# EAGLE board interstage_A1v2 (EAGLE 9.2.2)
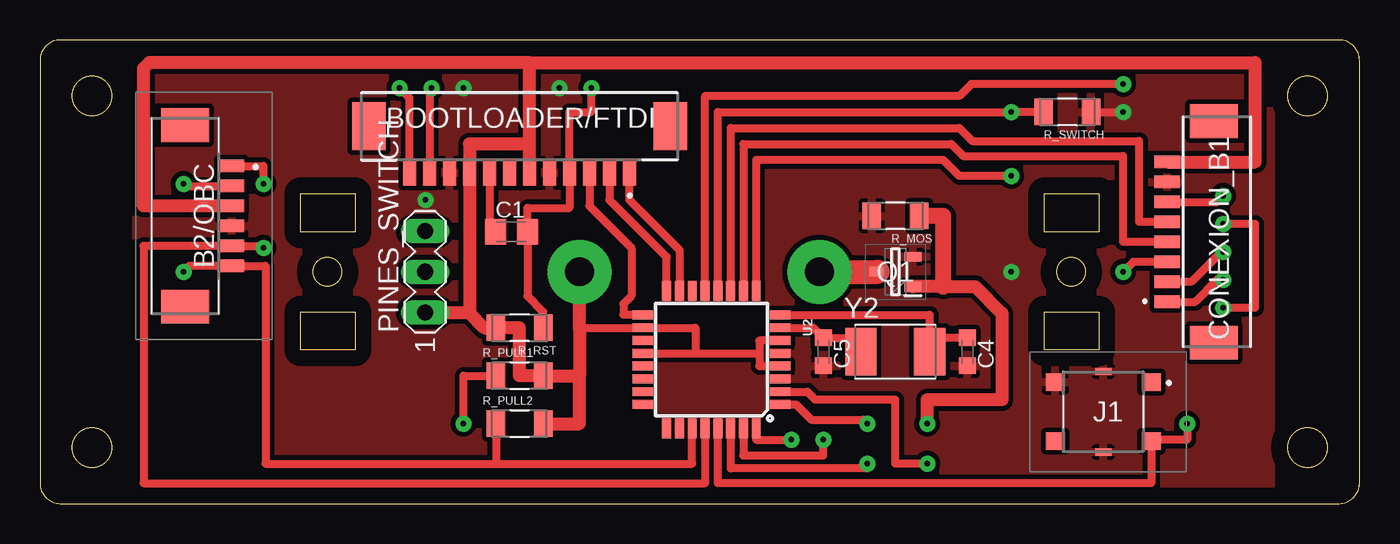
[diagram p0: board, top side]
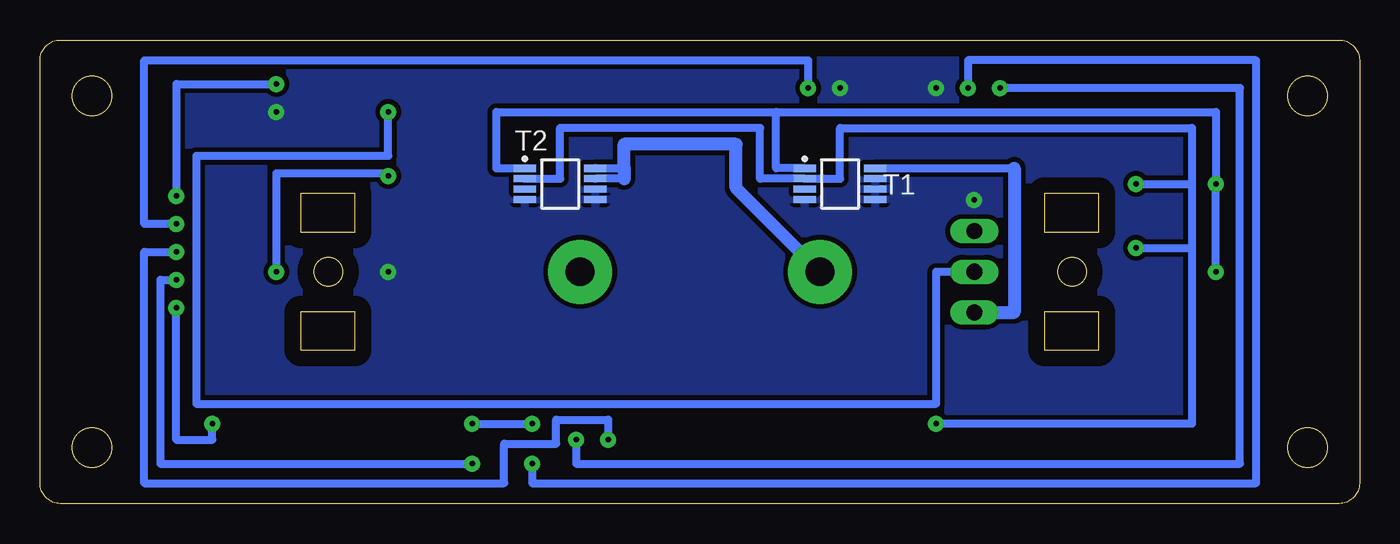
[diagram p1: board, bottom side, seen from below]

Size 82.5 x 29 mm. Coordinates in mm from the lower left corner, seen from the top.
Outline: 16.3,17 16.3,19.4 19.7,19.4 19.7,17 16.3,17
Outline: 62.8,9.6 62.8,12 66.2,12 66.2,9.6 62.8,9.6
Outline: 16.3,9.6 16.3,12 19.7,12 19.7,9.6 16.3,9.6
Outline: 62.8,17 62.8,19.4 66.2,19.4 66.2,17 62.8,17
Outline: 0,1.27 arc90 1.27,0 81.23,0 arc90 82.5,1.27 82.5,27.73 arc90 81.23,29 1.27,29 arc90 0,27.73 0,1.27
Outline: circle at 3.25,25.5 radius 1.25
Outline: circle at 79.25,3.5 radius 1.25
Outline: circle at 79.25,25.5 radius 1.25
Outline: circle at 3.25,3.5 radius 1.25
Outline: circle at 17.98,14.5 radius 0.9
Outline: circle at 64.48,14.5 radius 0.9
Copper layers (1*16): Top 0.035mm / dielectric 1.5mm / Bottom 0.035mm
Design rules "default *": minimum track width 6mil, minimum drill 0.35mm, track to track 0.3mm, track to pad 6mil, pad to pad 6mil, via to via 6mil, smd to smd 6mil, copper to edge 40mil, drill to drill 6mil, minimum pad ring 10mil, minimum via ring 8mil, stop-mask expansion 4mil, vias tented up to drill 0mil, thermal gap 10mil

## Footprints (pad centres in the part's own frame; a part is rotated, then mirrored left to right if it is on the bottom)
532617006 = smd 0.8 x 1.6: 1 3.125,-2.5; 2 1.875,-2.5; 3 0.625,-2.5; 4 -0.625,-2.5; 5 -1.875,-2.5; 6 -3.125,-2.5 | smd 2.1 x 3: MP1 5.675,0.4; MP2 -5.675,0.4
53261-1271 = smd 0.8 x 1.6: 1 -6.875,0.8; 2 -5.625,0.8; 3 -4.375,0.8; 4 -3.125,0.8; 5 -1.875,0.8; 6 -0.625,0.8; 7 0.625,0.8; 8 1.875,0.8; 9 3.125,0.8; 10 4.375,0.8; 11 5.625,0.8; 12 6.875,0.8 | smd 2.1 x 3: 13 -9.425,-2.1; 14 9.425,-2.1
C0805K = smd 1.3 x 1.6: 1 -1,0; 2 1,0
C0603K = smd 1.05 x 1.08: 1 -0.875,0; 2 0.875,0
53261-0871 = smd 0.8 x 1.6: 1 -4.375,1.004; 2 -3.125,1.004; 3 -1.875,1.004; 4 -0.625,1.004; 5 0.625,1.004; 6 1.875,1.004; 7 3.125,1.004; 8 4.375,1.004 | smd 2.1 x 3: 9 6.925,-1.896; 10 -6.925,-1.896
431151015826 = smd 1.2 x 1.1: 1 -3,-1.85; 2 -3,1.85; 3 3,-1.85; 4 3,1.85 | smd 1 x 0.45: 5 0,-2.525; 6 0,2.525
MA03-1 = drill 1.016 long: 1 -2.54,0; 2 0,0; 3 2.54,0
SOT95P230X110-3N = smd 1.05 x 0.6: 1 -1.1,0.95; 2 -1.1,-0.95; 3 1.1,0
RESC3216X70N = smd 1.16 x 1.68: 1 -1.475,0; 2 1.475,0
SOP65P490X110-8N = smd 1.4 x 0.45: 1 -2.2,0.975; 2 -2.2,0.325; 3 -2.2,-0.325; 4 -2.2,-0.975; 5 2.2,-0.975; 6 2.2,-0.325; 7 2.2,0.325; 8 2.2,0.975
TQFP32-08 = smd 1.27 x 0.559: 1 -4.293,2.8; 2 -4.293,2; 3 -4.293,1.2; 4 -4.293,0.4; 5 -4.293,-0.4; 6 -4.293,-1.2; 7 -4.293,-2; 8 -4.293,-2.8; 17 4.293,-2.8; 18 4.293,-2; 19 4.293,-1.2; 20 4.293,-0.4; 21 4.293,0.4; 22 4.293,1.2; 23 4.293,2; 24 4.293,2.8 | smd 0.559 x 1.27: 9 -2.8,-4.293; 10 -2,-4.293; 11 -1.2,-4.293; 12 -0.4,-4.293; 13 0.4,-4.293; 14 1.2,-4.293; 15 2,-4.293; 16 2.8,-4.293; 25 2.8,4.293; 26 2,4.293; 27 1.2,4.293; 28 0.4,4.293; 29 -0.4,4.293; 30 -1.2,4.293; 31 -2,4.293; 32 -2.8,4.293
XTAL500X320X130N = smd 1.95 x 2.95: 1 -2.15,0; 2 2.15,0

## Placement (x,y rotation side)
B2/OBC  53261-7006  [532617006]  9.48,18 90 top
BOOTLOADER/FTDI  53261-1271  [53261-1271]  29.98,21.5 180 top
C1  100nF  [C0805K]  29.48,17 0 top
C4  22pF  [C0603K]  57.98,9.5 270 top
C5  22pF  [C0603K]  48.98,9.5 270 top
CONEXION_B1  53261-0871  [53261-0871]  71.48,17 90 top
J1  431151015826  [431151015826]  66.48,5.75 180 top
PINES_SWITCH  [MA03-1]  24.08,14.5 90 top
Q1  PMV16XNR  [SOT95P230X110-3N]  53.48,14.5 180 top
R_MOS  ERA-8AEB331V  [RESC3216X70N]  53.48,18 180 top
R_PULL1  ERA-8AEB472V  [RESC3216X70N]  29.98,8 0 top
R_PULL2  ERA-8AEB472V  [RESC3216X70N]  29.98,5 0 top
R_RST  ERA-8AEB103V  [RESC3216X70N]  29.98,11 180 top
R_SWITCH  ERA-8AEB331V  [RESC3216X70N]  64.23,24.5 180 top
T1  MCP9808T-E/MS  [SOP65P490X110-8N]  32.48,20 0 bottom
T2  MCP9808T-E/MS  [SOP65P490X110-8N]  49.98,20 0 bottom
U2  ATMEGA328P_TQFP  [TQFP32-08]  41.98,9 180 top
Y2  ABM3-16.000MHZ-D2Y-T  [XTAL500X320X130N]  53.48,9.5 0 top

## Library data of the parts
B2/OBC = SamacSys_Parts; DESCRIPTION: 1.25mm Pitch, PicoBlade PCB Header, Single Row, Right-Angle, Surface Mount, Gold (Au) Plating, Friction Lock, Circuits, Tape and Reel; HEIGHT: 3.6mm; MANUFACTURER_NAME: Molex; MANUFACTURER_PART_NUMBER: 53261-7006; MOUSER_PART_NUMBER: 538-53261-7006; MOUSER_PRICE-STOCK: https://www.mouser.co.uk/ProductDetail/Molex/53261-7006?qs=0lSvoLzn4L%2FSBef0BTU2GA%3D%3D
BOOTLOADER/FTDI = SamacSys_Parts; DESCRIPTION: Molex PICOBLADE Series, Series Number 53261, 1.25mm Pitch 12 Way 1 Row Right Angle PCB Header, Solder Termination, 1A; HEIGHT: mm; MANUFACTURER_NAME: Molex; MANUFACTURER_PART_NUMBER: 53261-1271; MOUSER_PART_NUMBER: 538-53261-1271; MOUSER_PRICE-STOCK: https://www.mouser.co.uk/ProductDetail/Molex/53261-1271?qs=%252B72YyncTwW8ciqCjtXK7Ww%3D%3D
C1 C4 C5 = rcl; SPICEPREFIX: C
CONEXION_B1 = SamacSys_Parts; DESCRIPTION: Molex PICOBLADE Series, Series Number 53261, 1.25mm Pitch, 8 Way 1 Row Shrouded Right Angle PCB Header, Surface Mount; HEIGHT: mm; MANUFACTURER_NAME: Molex; MANUFACTURER_PART_NUMBER: 53261-0871; MOUSER_PART_NUMBER: 538-53261-0871; MOUSER_PRICE-STOCK: https://www.mouser.co.uk/ProductDetail/Molex/53261-0871?qs=%252B72YyncTwW%252BggfdCJ7Netw%3D%3D
J1 = SamacSys_Parts; DESCRIPTION: White Tactile Tactile Switch, NO 20 mA 0.3mm Surface Mount; HEIGHT: 1.6mm; MANUFACTURER_NAME: Wurth Elektronik; MANUFACTURER_PART_NUMBER: 431151015826; MOUSER_PART_NUMBER: 710-431151015826; MOUSER_PRICE-STOCK: https://www.mouser.co.uk/ProductDetail/Wurth-Elektronik/431151015826?qs=wr8lucFkNMWt0fEnpc%252BesA%3D%3D
PINES_SWITCH = con-lstb; OC_FARNELL: unknown; OC_NEWARK: unknown
Q1 = SamacSys_Parts; DESCRIPTION: Nexperia PMV16XNR N-channel MOSFET, 8.6 A, 20 V PMV16XN, 3-Pin SOT-23; HEIGHT: 1.1mm; MANUFACTURER_NAME: Nexperia; MANUFACTURER_PART_NUMBER: PMV16XNR; MOUSER_PART_NUMBER: 771-PMV16XNR; MOUSER_PRICE-STOCK: https://www.mouser.com/Search/Refine.aspx?Keyword=771-PMV16XNR
R_MOS R_SWITCH = resistor_330_smd; DESCRIPTION: 330 Ohms ±0.1% 0.25W, 1/4W Chip Resistor 1206 (3216 Metric) Automotive AEC-Q200 Thin Film; DIGI-KEY_PART_NUMBER: P330BCCT-ND; MF: Panasonic Electronic; MP: ERA-8AEB331V; PACKAGE: 3216 Panasonic Electronic Components
R_PULL1 R_PULL2 = resistor_4700_smd; DESCRIPTION: RES SMD 4.7K OHM 0.1% 1/4W 1206; DIGI-KEY_PART_NUMBER: P4.7KBCCT-ND; DIGIKEY-PURCHASE-URL: https://snapeda.com/shop?store=DigiKey&id=3718815; MF: Panasonic; MP: ERA-8AEB472V; PACKAGE: 3216 Panasonic Electronic Components
R_RST = resistor_10000_smd; DESCRIPTION: 10 kOhms ±0.1% 0.25W, 1/4W Chip Resistor 1206 (3216 Metric) Automotive AEC-Q200 Thin Film; DIGI-KEY_PART_NUMBER: P10KBCCT-ND; DIGIKEY-PURCHASE-URL: https://snapeda.com/shop?store=DigiKey&id=3229630; MF: Panasonic Electronic Components; MP: ERA-8AEB103V; PACKAGE: 3216 Panasonic Electronic Components
T1 T2 = sensorSPEL; DESCRIPTION: Temperature Sensor Digital, Local -40°C ~ 125°C 10 b 8-MSOP; DIGI-KEY_PART_NUMBER: MCP9808T-E/MSCT-ND; MF: Microchip; MP: MCP9808T-E/MS; PACKAGE: MSOP-8 Microchip
U2 = SparkFun-IC-Microcontroller; PROD_ID: IC-09069
Y2 = ABM3-16.000MHZ-D2Y-T; DESCRIPTION: 16MHz ±20ppm Crystal 18pF 40 Ohms 2-SMD, No Lead; DIGI-KEY_PART_NUMBER: 535-10638-1-ND; DIGIKEY-PURCHASE-URL: https://snapeda.com/shop?store=DigiKey&id=55267; MF: Abracon; MP: ABM3-16.000MHZ-D2Y-T; PACKAGE: SMD-2 Abracon

## Nets
AIN0: CONEXION_B1.4 U2.10
AIN1: CONEXION_B1.5 U2.11
DTR: BOOTLOADER/FTDI.8 C1.1
GND: B2/OBC.4 BOOTLOADER/FTDI.5 BOOTLOADER/FTDI.10 C4.2 C5.2 CONEXION_B1.7 J1.3 J1.5 J1.6 Q1.2 R_MOS.2 R_SWITCH.1 T1.4 T1.5 T1.6 T1.7 T2.4 T2.5 T2.6 U2.3 U2.5
INT0: CONEXION_B1.2 U2.32
INT1: Q1.1 R_MOS.1 U2.1
MISO: BOOTLOADER/FTDI.2 U2.16
MOSI: BOOTLOADER/FTDI.1 U2.15
N$1: C5.1 U2.7 Y2.1
N$2: C4.1 U2.8 Y2.2
NICROMO: Q1.3
OC1A: CONEXION_B1.6 U2.13
RST: BOOTLOADER/FTDI.4 C1.2 J1.2 R_RST.1 U2.29
RXD: BOOTLOADER/FTDI.11 U2.30
SCK: BOOTLOADER/FTDI.3 U2.17
SCL: B2/OBC.1 B2/OBC.5 R_PULL1.1 T1.2 T2.2 U2.28
SDA: B2/OBC.2 B2/OBC.6 R_PULL2.1 T1.1 T2.1 U2.27
SWITCH: PINES_SWITCH.2 R_SWITCH.2 U2.12
T0: CONEXION_B1.1 U2.2
T1: CONEXION_B1.3 U2.9
TXD: BOOTLOADER/FTDI.12 U2.31
VCC: B2/OBC.3 BOOTLOADER/FTDI.6 BOOTLOADER/FTDI.9 CONEXION_B1.8 PINES_SWITCH.1 R_PULL1.2 R_PULL2.2 R_RST.2 T1.8 T2.7 T2.8 U2.4 U2.6 U2.18 U2.20

## Tracks (layer width: path | path; a pad name or v marks a point on that pad's centre or on a via)
AIN0
  Top 0.5: U2.10 43.98,22.5 56.98,22.5 57.73,21.75 67.73,21.75 67.73,16.38 CONEXION_B1.4
AIN1
  Top 0.5: U2.11 43.18,23.5 57.48,23.5 58.3,22.68 68.73,22.68 68.73,17.62 CONEXION_B1.5
DTR
  Top 0.5: BOOTLOADER/FTDI.8 28.11,17.38 C1.1
GND  (via drill 0.35 pad 1)
  Top 0.5: R_SWITCH.1 v67.73,24.5
  other vias: 26.48,26 32.48,26 60.73,14.5 24.11,19
  pour Top (isolate 0.25): 5.98,28.5 5.98,0.5 76.98,0.5 76.98,28.5
  pour Bottom (isolate 0.25): 76.98,0.5 76.98,28.5 5.98,28.5 5.98,0.5
INT0  (via drill 0.35 pad 1)
  Top 0.5: U2.32 44.78,4 v46.98,4 | CONEXION_B1.2 71.98,13.88 73.85,15.75 v73.98,15.75
  Bottom 0.5: v73.98,15.75 75.98,15.75 75.98,1.27 53.48,1.27 53.48,3.75 50.23,3.75 50.23,5.25 46.98,5.25 v46.98,4
INT1  (via drill 0.35 pad 1)
  Top 0.5: U2.1 47.28,6.2 48.23,5.25 51.48,5.25 v51.73,5 | 54.61,13.58 Q1.1
  Top 0.8: v55.48,5 55.48,6.5 60.15,6.5 60.15,11.9 58.48,13.58 56.48,13.58 54.61,13.58
  Top 1: 56.48,13.58 56.48,18 R_MOS.1
  Bottom 0.5: v55.48,5 v51.73,5
MISO
  Top 0.5: U2.16 39.18,15.43 35.6,19 BOOTLOADER/FTDI.2
MOSI
  Top 0.5: U2.15 39.98,15.88 36.85,19 BOOTLOADER/FTDI.1
N$1
  Top 0.5: U2.7 48.35,11 C5.1 50.45,10.38 Y2.1
N$2
  Top 0.5: U2.8 55.63,11.8 Y2.2 56.5,10.38 C4.1
NICROMO  (via drill 1.8 pad 4)
  Top 1.5: v48.73,14.5 Q1.3
OC1A  (via drill 0.35 pad 1)
  Top 0.5: U2.13 41.58,25.5 57.48,25.5 58.23,26.25 v67.73,26.25 | v73.98,19.25 73.61,18.88 CONEXION_B1.6
  Bottom 0.5: v73.98,19.25 73.98,26.25 v67.73,26.25
RST  (via drill 0.35 pad 1)
  Top 0.5: v73.98,12.25 75.98,12.25 75.98,17.5 v73.98,17.5 | v34.48,26 34.48,24.5 33.1,24.5 BOOTLOADER/FTDI.4 33.1,18.5 30.48,18.5 C1.2 30.48,12.97 31.46,12 R_RST.1 | U2.29 42.38,1.27 69.48,1.27 J1.2 69.48,4 71.73,4 v71.73,5
  Bottom 0.5: v73.98,17.5 75.98,17.5 75.98,27.73 34.48,27.73 v34.48,26 | v73.98,12.25 73.98,4 71.73,4 v71.73,5
RXD  (via drill 0.35 pad 1)
  Top 0.5: v51.73,2.5 51.73,2.2 43.18,2.2 U2.30 | v24.48,26 24.36,25.88 BOOTLOADER/FTDI.11
  Bottom 0.5: v51.73,2.5 51.73,1.27 6.48,1.27 6.48,27.73 24.48,27.73 v24.48,26
SCK
  Top 0.5: U2.17 36.48,11.8 36.48,12.5 36.98,13 36.98,16 34.35,18.62 BOOTLOADER/FTDI.3
SCL  (via drill 0.35 pad 1)
  Top 0.5: U2.28 41.58,1.27 6.48,1.27 6.48,16.12 B2/OBC.5 13.98,16.12 v13.98,16 | v13.98,20 13.98,21.12 B2/OBC.1 | R_PULL1.1 26.48,8 v26.48,5
  Bottom 0.5: T2.2 49.98,20.32 49.98,23.5 37.48,23.5 37.48,20.32 T1.2 32.48,20.32 32.48,23.5 10.48,23.5 10.48,20 | v13.98,20 10.48,20 | 10.48,20 10.48,16 | 10.48,16 10.48,5 v26.48,5 | v13.98,16 10.48,16
SDA  (via drill 0.35 pad 1)
  Top 0.5: U2.27 40.78,2.5 28.48,2.5 | 28.48,2.5 14.11,2.5 14.11,14.88 B2/OBC.6 9.36,14.88 v8.98,14.5 | v8.98,20 9.11,19.88 B2/OBC.2 | R_PULL2.1 28.5,2.52 28.48,2.5
  Bottom 0.5: v8.98,14.5 v8.98,20 8.98,24.5 36.48,24.5 | T2.1 53.98,20.98 53.98,24.5 36.48,24.5 | T1.1 36.48,20.98 36.48,24.5
SWITCH  (via drill 0.35 pad 1)
  Top 0.5: U2.12 42.38,24.5 v60.73,24.5 R_SWITCH.2
  Bottom 0.5: v60.73,24.5 60.73,21.75 72.73,21.75 72.73,6.25 26.48,6.25 26.48,14.5 PINES_SWITCH.2
T0  (via drill 0.35 pad 1)
  Top 0.5: U2.2 47.98,7 48.48,6.5 53.48,6.5 53.48,2.5 v55.48,2.5 | v73.98,14 73.6,14 72.23,12.62 CONEXION_B1.1
  Bottom 0.5: v73.98,14 74.98,14 74.98,2.5 v55.48,2.5
T1  (via drill 0.35 pad 1)
  Top 0.5: U2.9 44.78,21.5 56.48,21.5 57.48,20.5 v60.73,20.5 | CONEXION_B1.3 68.36,15.12 v67.73,14.5
  Bottom 0.5: v60.73,20.5 60.73,20.67 67.73,20.67 v67.73,14.5
TXD  (via drill 0.35 pad 1)
  Top 0.5: v48.98,4 48.98,3 43.98,3 U2.31 | v22.48,26 23.11,25.38 BOOTLOADER/FTDI.12
  Bottom 0.5: v48.98,4 48.98,2.5 7.48,2.5 7.48,26 v22.48,26
VCC  (via drill 1.8 pad 4)
  Top 0.5: U2.4 44.98,8.6 44.98,9.4 | U2.6 44.98,10.2 44.98,9.4 | U2.20 40.98,9.4 | 40.98,9.4 44.98,9.4 | 40.98,9.4 40.98,11 U2.18 33.73,11 | 26.86,21.5 BOOTLOADER/FTDI.9 | 26.82,11.96 26.86,12
  Top 0.8: CONEXION_B1.8 75.98,21.38 75.98,27.58 30.61,27.58 | v33.73,14.5 33.73,11 33.73,8 | BOOTLOADER/FTDI.9 26.86,12 | B2/OBC.3 6.48,18.62 6.48,27.23 6.83,27.58 30.61,27.58 | PINES_SWITCH.1 26.82,11.96 27.78,11 R_RST.2 29.98,11 29.98,8 R_PULL1.2 33.73,8 | R_PULL2.2 33.73,5 33.73,8 | 30.61,22.5 26.86,22.5 26.86,21.5 | BOOTLOADER/FTDI.6 30.61,22.5 | 30.61,22.5 30.61,27.58
  Bottom 0.5: T1.8 21.58,20.98 | T2.8 47.78,21 45.98,21 | 45.98,20.32 T2.7
  Bottom 0.8: 21.58,20.98 21.58,11.96 PINES_SWITCH.1 | 45.98,20.32 45.98,21 45.98,22.48 38.98,22.48 38.98,19.75 v33.73,14.5